# Altium PCB PCB_TPS40210DGQ.PcbDoc
Units mil, origin at the board's own origin, x right, y up, seen from the top; angles counter-clockwise.
Board outline 6000 x 4000 mil, 2 copper layers (Top Layer, Bottom Layer); 20 components, 0 nets, 50 pads, 0 vias.
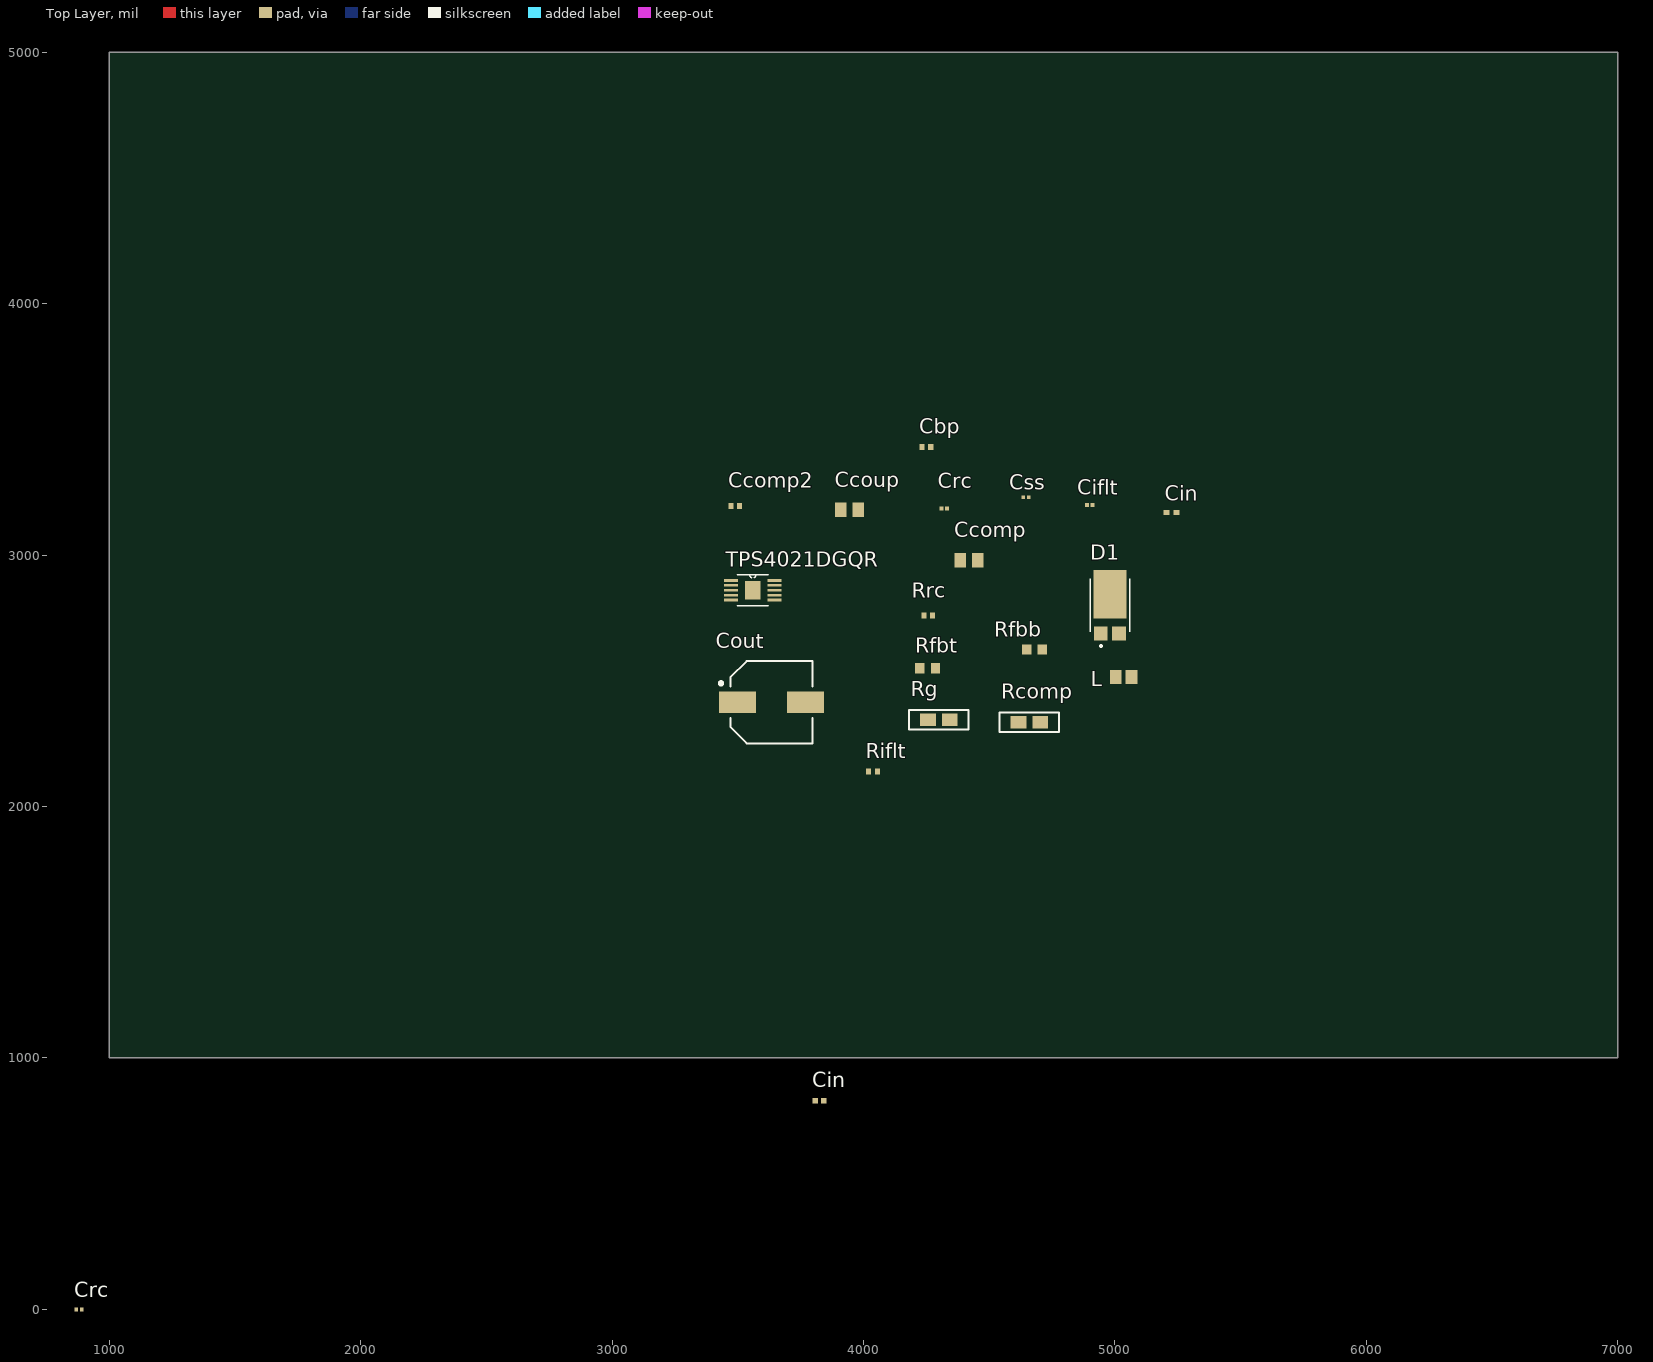
[diagram p0: Top Layer view]
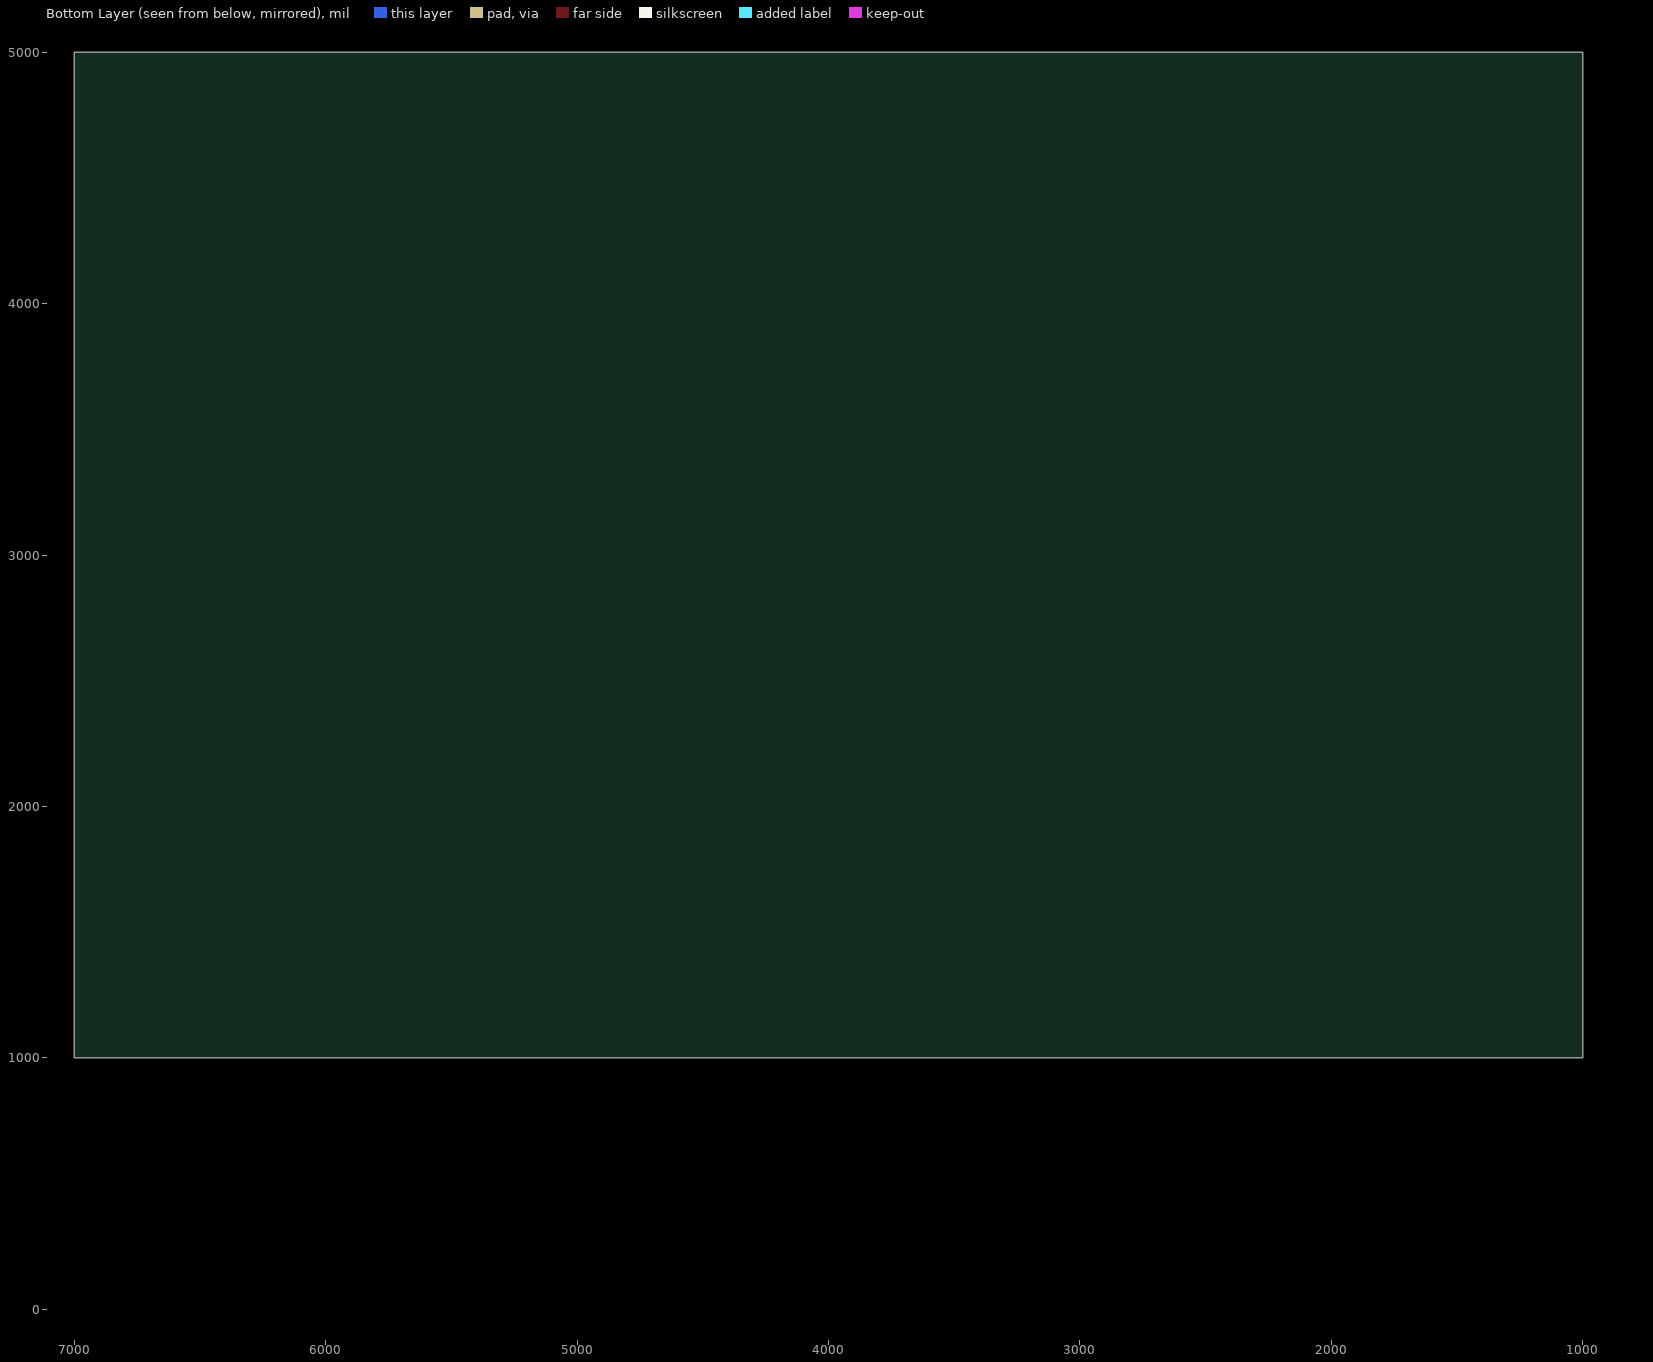
[diagram p1: Bottom Layer view, seen from below]

## Layer stack, top to bottom
Top Solder: solder mask 0.4, Solder Resist, Dk 3.5
Top Layer: signal copper 1.4
Dielectric 1: dielectric 12.6, FR-4, Dk 4.8
Bottom Layer: signal copper 1.4
Bottom Solder: solder mask 0.4, Solder Resist, Dk 3.5

## Board outline
1000,1000 7000,1000 7000,5000 1000,5000

## Design rules (kind name [scope] priority, off if disabled: settings)
Clearance [All] p1: gap=10 ignorepadtopadclearanceinfootprint=FALSE except(0: Arc-Hole Track-Hole SMDPad-Hole THPad-Hole Via-Hole Fill-Hole Poly-Hole Region-Hole Text-Hole)
PolygonConnect [All] p1: connectstyle=Relief reliefconductorwidth=10 reliefentries=4 polygonreliefangle="90 Angle" airgapwidth=10
RoutingVias [All] p1: holewidth=28 width=50 viastyle="Through Hole" minholewidth=28 minwidth=50 maxholewidth=28 maxwidth=50
SolderMaskExpansion [All] p1: expansion=4
Width [All] p1: maxlimit=10 minlimit=10 preferedwidth=10
30 further rules are at their usual default settings.

## Components (designator, comment, footprint, x,y, rotation, side; value= is the part's Value field where it differs from the comment)
Cbp "Comment" *CAPC1005X55N#1 4250,3430 r0 top
Ccomp "Comment" *CAPC2012X100N 4420,2980 r0 top
Ccomp2 "Comment" *CAPC1005X55N#2 3490,3195 r0 top
Ccoup "Comment" *CAPC2012X145N 3945,3180 r0 top
Ciflt "Comment" *CAPC603X33N 4900,3200 r0 top
Cin "Comment" *CAPC1005X55N#1 3825,830 r0 top
Cin "Comment" 0402 5225,3170 r0 top
Cout "Comment" *CAPAE830X1200N 3634.17,2415 r0 top
Crc "Comment" *CAPC0603X33N 880,0 r0 top
Crc "Comment" *CAPC0603X33N 4321.06,3185 r0 top
Css "Comment" *CAPC0603X33N 4646.06,3230 r0 top
D1 "Comment" *DIO_PDS360-13 4980,2800 r0 top
L "Comment" 2029 5035,2515 r0 top
Rcomp "Comment" Rfbb 4660,2335 r0 top
Rfbb "Comment" *RESC1608X50N 4680,2625 r0 top
Rfbt "Comment" *RESC1608X50N 4255,2550 r0 top
Rg "Comment" Rfbb 4300,2345 r0 top
Riflt "Comment" *RESC1005X40N 4037.52,2140 r0 top
Rrc "Comment" *RESC1005X40N 4257.48,2760 r0 top
TPS4021DGQR "Comment" *SOP50P490X110-11N 3560,2860 r0 top

## Footprints (in the part's own frame and the unit in brackets; to place one, negate y for a bottom-side part, rotate by r counter-clockwise, add the part's x,y. Pads: shape width x height; smd on the part's side, far side on the other; paste and mask are expansions set on the pad)
0402 [mm] "Chip Capacitor, Body 1.0x0.5mm, IPC High Density"
  rect 0.6x0.5 smd: 1(-0.5,0) 2(0.5,0)
  body extent -0.55,-0.3 0.55,0.3, height 1.3
2029 [mm] "Chip Inductor, Body 2.0x1.2mm, IPC High Density"
  rect 1.2x1.4 smd: 1(-0.8,0) 2(0.8,0)
  body extent -1.1,-0.7 1.1,0.7, height 0.55
*CAPAE830X1200N [mm]
  rect 3.75x2.15 smd: 1(-3.45,0) 2(3.45,0)
  silkscreen extent -5.32,-4.15 4.15,4.15
*CAPC603X33N [mm]
  rect 0.38x0.4 smd: 1(-0.281,0) 2(0.281,0)
*CAPC0603X33N [mm]
  rect 0.38x0.4 smd: 1(-0.281,0) 2(0.281,0)
*CAPC1005X55N#1 [mm]
  rect 0.53x0.6 smd: 1(-0.437,0) 2(0.437,0)
*CAPC1005X55N#2 [mm]
  rect 0.54x0.6 smd: 1(-0.432,0) 2(0.432,0)
*CAPC2012X100N [mm]
  rect 1.15x1.47 smd: 1(-0.88,0) 2(0.88,0)
*CAPC2012X145N [mm]
  rect 1.15x1.47 smd: 1(-0.88,0) 2(0.88,0)
*DIO_PDS360-13 [mm]
  rect 1.39x1.4 smd: 1(-0.92,-2.856) 2(0.92,-2.856)
  rect 3.36x4.86 smd: 3(0,1.126)
  silkscreen extent -1.98,-4.2 1.98,2.69
*RESC1005X40N [mm]
  rect 0.51x0.6 smd: 1(-0.445,0) 2(0.445,0)
*RESC1608X50N [mm]
  rect 0.94x1.02 smd: 1(-0.79,0) 2(0.79,0)
*SOP50P490X110-11N [mil]
  rect 56x11 smd: 1(-86,39) 2(-86,20) 3(-86,0) 4(-86,-20) 5(-86,-39) 6(86,-39) 7(86,-20) 8(86,0) 9(86,20) 10(86,39)
  rect 62x74 smd: 11(0,0)
  silkscreen extent -61,-61 61,61
Rfbb [mm]
  rect 1.6x1.3 smd: 1(-1.1,0) 2(1.1,0)
  silkscreen extent -3,-1 3,1

## Nets (pads, with @x,y where several pads share a name; then routed paths per layer and width w, separated by ;. In a path a pad name is that pad's centre, name@x,y a point inside that pad or via, vN(x,y) a via of type N, cw(c..) or ccw(c..) an arc to the next point about the centre after c; other vN are vias at no path point)
pads on no net: Cbp.1 Cbp.2 Ccomp2.1 Ccomp2.2 Ccomp.1 Ccomp.2 Ccoup.1 Ccoup.2 Ciflt.1 Ciflt.2 Cin.1 Cin.2 Cout.1 Cout.2 Crc.1 Crc.2 Css.1 Css.2 D1.1 D1.2 D1.3 L.1 L.2 Rcomp.1 Rcomp.2 Rfbb.1 Rfbb.2 Rfbt.1 Rfbt.2 Rg.1 Rg.2 Riflt.1 Riflt.2 Rrc.1 Rrc.2 TPS4021DGQR.1 TPS4021DGQR.2 TPS4021DGQR.3 TPS4021DGQR.4 TPS4021DGQR.5 TPS4021DGQR.6 TPS4021DGQR.7 TPS4021DGQR.8 TPS4021DGQR.9 TPS4021DGQR.10 TPS4021DGQR.11